# Altium PCB 606-100868-r01.pcbdoc
Units mm, origin at the board's own origin, x right, y up, seen from the top; angles counter-clockwise.
Board outline 50 x 10 mm, 2 copper layers (Top Layer, Bottom Layer), stack 1.471 mm thick; 23 components, 9 nets, 72 pads, 30 vias.
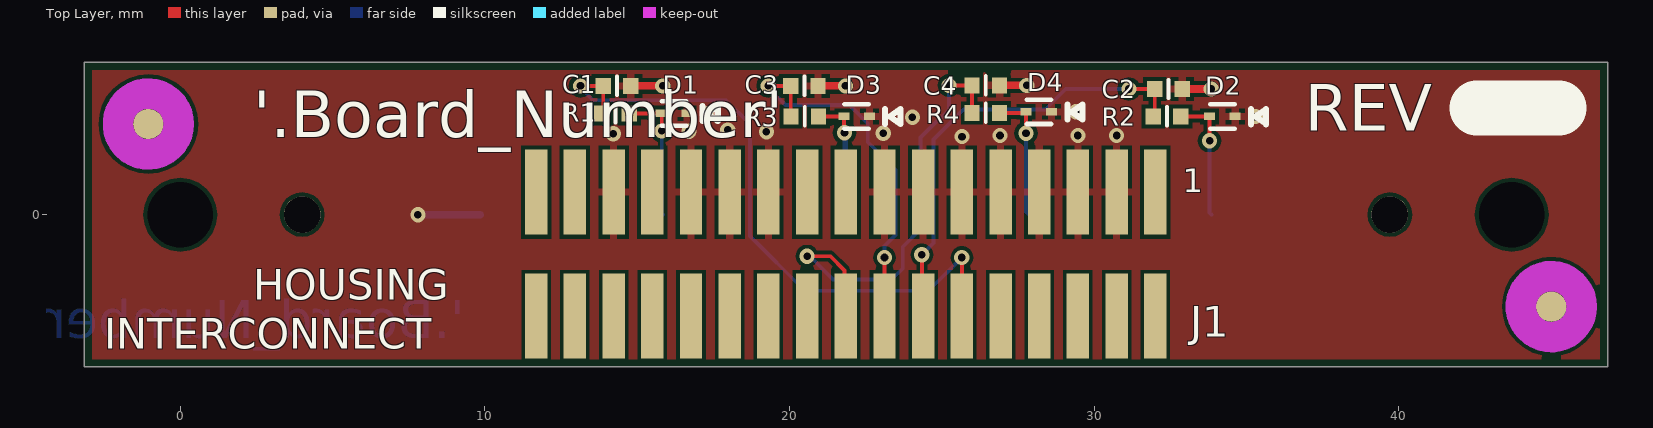
[diagram p0: Top Layer view]
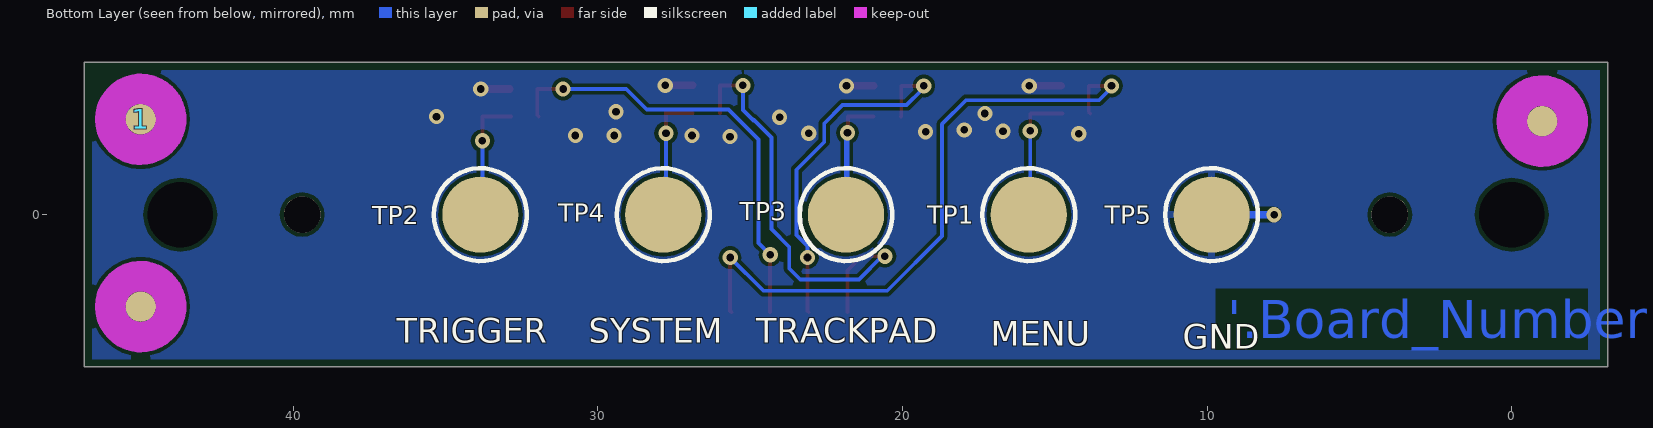
[diagram p1: Bottom Layer view, seen from below]

## Layer stack, top to bottom
Top Solder: solder mask 0.0102, Solder Resist, Dk 3.5
Top Layer: signal copper 0.0356
Dielectric 1: core 1.4, FR-4, Dk 4.2
Bottom Layer: signal copper 0.0356
Bottom Solder: solder mask 0.0102, Solder Resist, Dk 3.5

## Board outline
-3.15,-5 46.85,-5 46.85,5 -3.15,5

## Design rules (kind name [scope] priority, off if disabled: settings)
BoardOutlineClearance [All] p1: gap=0.25 except(0: Text-OutlineEdge)
Clearance [All] p1: gap=0.125
ComponentClearance [All] p1: gap=0.18 collisioncheckmode=3 verticalgap=0.18 showdistances=FALSE
HoleSize [All] p1: absolutevalues=TRUE maxlimit=2.7 minlimit=0.025 maxpercent=80.000 minpercent=20.000
MinimumSolderMaskSliver MinimumSolderMaskSliver_1 [isvia vs IsPad] p1: minsoldermaskwidth=0
MinimumSolderMaskSliver [All] p2: minsoldermaskwidth=0.05
PlaneClearance [All] p1: clearance=0.2
PlaneConnect [All] p1: planeconnectstyle=Direct reliefexpansion=0.508 reliefentries=4 reliefconductorwidth=0.254 reliefairgap=0.254
PolygonConnect MTG [InPadClass('Thick_Thermal')] p1: connectstyle=Relief reliefconductorwidth=0.4 reliefentries=4 polygonreliefangle="90 Angle" airgapwidth=0.125
PolygonConnect POLY_VIA [IsVia vs IsPolygon] p2: connectstyle=Direct reliefconductorwidth=0.254 reliefentries=4 polygonreliefangle="90 Angle" airgapwidth=0.254
PolygonConnect PolygonConnect_1 [All] p3: connectstyle=Relief reliefconductorwidth=0.25 reliefentries=4 polygonreliefangle="90 Angle" airgapwidth=0.125
RoomDefinition Housing_Interconnect [InComponentClass('Housing_Interconnect')] p1: confinementstyle=ConfineIn formatcopy=TRUE lockcomponents=FALSE outline -13.285,-3.467 70.231,-3.467 70.231,18.529 -13.285,18.529
RoutingVias [All] p1: holewidth=0.25 width=0.5 viastyle="Through Hole" minholewidth=0.25 minwidth=0.5 maxholewidth=0.25 maxwidth=0.5
SilkToSilkClearance [All] p1 off: silktosilkclearance=0.05
SilkToSolderMaskClearance [IsPad] p1: minsilkscreentomaskgap=0.125 clearancetoexposedcopper=TRUE
SolderMaskExpansion [All] p1: expansion=0.05
Width PWR_GND [InNetClass('PWR_GND')] p1: maxlimit=0.25 minlimit=0.25 preferedwidth=0.25
Width CRITICAL [InNetClass('MOTOR_DRIVERS')] p2: maxlimit=0.4 minlimit=0.3 preferedwidth=0.4
Width [All] p3: maxlimit=0.5 minlimit=0.125 preferedwidth=0.125
23 further rules are at their usual default settings.

## Classes and differential pairs
component class Housing_Interconnect: C1 C2 C3 C4 D1 D2 D3 D4 J1 R1 R2 R3 R4 TP1 TP2 TP3 TP4 TP5
net class PWR_GND: GND

## Components (designator, comment, footprint, x,y, rotation, side; value= is the part's Value field where it differs from the comment)
1 "Comment" Fiducial_c100opening300 45,3.13 r180 bottom
C1 "0.1uF" 0402-IPCsm_55 14.335,4.225 r0 top
C2 "0.1uF" 0402-IPCsm_55 32.435,4.125 r0 top
C3 "0.1uF" 0402-IPCsm_55 20.485,4.225 r0 top
C4 "0.1uF" 0402-IPCsm_55 26.435,4.244 r0 top
D1 "ESD9R3.3ST5G" sod923-40 16.205,3.325 r0 top
D2 "ESD9R3.3ST5G" sod923-40 34.205,3.224 r0 top
D3 "ESD9R3.3ST5G" sod923-40 22.201,3.225 r0 top
D4 "ESD9R3.3ST5G" sod923-40 28.179,3.375 r0 top
J1 "FTSH-117-01-F-DV-K" FTSH-117-01-XXX-DV-K 21.843,-1.293 r180 top
R1 "100" 0402-IPCsm_40 14.285,3.325 r0 top
R2 "100" 0402-IPCsm_40 32.385,3.224 r0 top
R3 "100" 0402-IPCsm_40 20.496,3.225 r0 top
R4 "100" 0402-IPCsm_40 26.435,3.339 r0 top
TP1 "2.5mm" TPC250SMT 15.85,0 r180 bottom
TP2 "2.5mm" TPC250SMT 33.85,0 r180 bottom
TP3 "2.5mm" TPC250SMT 21.85,0 r180 bottom
TP4 "2.5mm" TPC250SMT 27.85,0 r180 bottom
TP5 "2.5mm" TPC250SMT 9.85,0 r180 bottom
? "Comment" Fiducial_c100opening300 -1.048,2.975 r0 top
? "Comment" Fiducial_c100opening300 45,-3.019 r0 top
? "Comment" Fiducial_c100opening300 45,-3.019 r180 bottom
? "Comment" Fiducial_c100opening300 -1,3.069 r180 bottom

## Footprints (in the part's own frame and the unit in brackets; to place one, negate y for a bottom-side part, rotate by r counter-clockwise, add the part's x,y. Pads: shape width x height; smd on the part's side, far side on the other; paste and mask are expansions set on the pad)
0402-IPCsm_40 [mm] "0402-IPCSM_40"
  rect 0.5x0.52 smd mask+0.05: 1(-0.45,0) 2(0.45,0)
  silkscreen extent 0,-0.3 0,0.3, body extent -0.5,-0.2 0.5,0.2, height 0.4
0402-IPCsm_55 [mm] "0402-IPCSM_55"
  rect 0.5x0.52 smd mask+0.05: 1(-0.45,0) 2(0.45,0)
  silkscreen extent 0,-0.3 0,0.3, body extent -0.5,-0.2 0.5,0.2, height 0.55
Fiducial_c100opening300 [mm]
  round 1 smd paste-10 mask+1: 0(0,0)
  Top Layer keep-out circle w1: c0,0 r1
FTSH-117-01-XXX-DV-K [mil]
  rect 29x110 smd mask+2: 1(-400,-80) 2(-400,80) 3(-350,-80) 4(-350,80) 5(-300,-80) 6(-300,80) 7(-250,-80) 8(-250,80) 9(-200,-80) 10(-200,80) 11(-150,-80) 12(-150,80) 13(-100,-80) 14(-100,80) 15(-50,-80) 16(-50,80) 17(0,-80) 18(0,80) 19(50,-80) 20(50,80) 21(100,-80) 22(100,80) 23(150,-80) 24(150,80) 25(200,-80) 26(200,80) 27(250,-80) 28(250,80) 29(300,-80) 30(300,80) 31(350,-80) 32(350,80) 33(400,-80) 34(400,80)
  body extent -424,-68 425,68, height 220
sod923-40 [mm] "SOD923 .4mm High"
  rect 0.36x0.25 smd mask+0.05: A(0.42,0) C(-0.42,0)
  silkscreen extent -0.4,-0.4 1.44,0.4, body extent -0.45,-0.35 0.45,0.35, height 0.4
TPC250SMT [mm] "2.5mm Circular Test Point"
  round 2.5 smd paste-5 mask+0.05: 1(0,0)
  silkscreen extent -1.53,-1.52 1.52,1.52

## Part data
C1 C2 C3 C4: library part GRM155R71C104KA88D, "CAP CER .1UF 16V X7R 0402"
D1 D2 D3 D4: "TVS DIODE 3.3VWM 7.8VC SOD923"
J1: library part FTSH-117-01-f-DV-k, "34 Positions Header, Shrouded Connector 0.050\" (1.27mm) Surface Mount Gold"
R1 R2 R3 R4: library part MCR01MZPJ101, "RES 100 OHM 5% 0402 SMD"
TP1 TP2 TP3 TP4 TP5: library part TPC250SMT, "TEST POINT, SMT, 2.50mm"

## Free pads (board coordinates)
  round 1.2 hole 1.2 unplated: 0(4,0) 0(39.7,0)
  round 2 hole 2.15 unplated: 1(0,0) 1(43.7,0)

## Via types
v1: diameter 0.5, hole 0.25, Top Layer to Bottom Layer, tented both sides, 30 vias

## Nets (pads, with @x,y where several pads share a name; then routed paths per layer and width w, separated by ;. In a path a pad name is that pad's centre, name@x,y a point inside that pad or via, vN(x,y) a via of type N, cw(c..) or ccw(c..) an arc to the next point about the centre after c; other vN are vias at no path point)
BTN_MENU: C1.1 J1.12 R1.1 | length 21.3
  Top Layer w0.125: v1(13.135,4.225) C1.1 13.885,3.375 R1.1 ; J1.12@25.61,-3.2 25.653,-3.157 v1(25.653,-1.407)
  Bottom Layer w0.125: v1@13.2,4.1 13.542,3.758 17.913,3.758 18.7,2.97 18.7,-0.704 20.496,-2.5 24.56,-2.5 v1(25.653,-1.407)
BTN_SYS: C4.1 J1.18 R4.1 | length 14.7
  Top Layer w0.125: v1(20.573,-1.362) 21.332,-1.362 21.8,-1.83 J1.18@21.8,-3.2 ; v1(25.235,4.244) C4.1 R4.1
  Bottom Layer w0.125: v1(20.573,-1.362) 20.662,-1.362 21.425,-2.125 23.35,-2.125 23.711,-1.763 23.711,-1.057 24.3,-0.469 24.3,2.535 24.891,3.126 ; 24.891,3.09 25.235,3.433 v1(25.235,4.244)
BTN_TRACK: C3.1 J1.16 R3.1 | length 12.1
  Top Layer w0.125: v1(19.295,4.225) C3.1 20.035,3.236 R3.1 ; J1.16@23.07,-3.2 23.113,-3.157 v1(23.113,-1.407)
  Bottom Layer w0.125: v1@19.36,4.1 19.865,3.595 21.962,3.595 22.562,2.995 22.562,2.389 23.479,1.473 23.479,-0.666 23.113,-1.032 v1(23.113,-1.407)
BTN_TRIG: C2.1 J1.14 R2.1 | length 14.7
  Top Layer w0.125: J1.14@24.34,-3.2 v1(24.34,-1.318) ; v1(31.135,4.125) C2.1 31.985,3.274 R2.1
  Bottom Layer w0.125: v1(24.34,-1.318) 24.722,-0.935 24.722,2.469 25.706,3.452 28.388,3.452 29.06,4.125 v1(31.135,4.125)
GND: C1.2 C2.2 C3.2 C4.2 D1.A D2.A D3.A D4.A J1.3 J1.5 J1.7 J1.9 J1.11 J1.13 J1.15 J1.21 J1.23 J1.25 J1.29 TP5.1 | length 5.8
  Top Layer w0.25: C1.2 v1(15.835,4.225) ; C3.2 v1(21.835,4.225) ; C4.2 v1(27.785,4.244) ; C2.2 v1(33.835,4.125)
  Bottom Layer w0.25: v1(7.8,0) TP5.1
  other v1: 25.658,2.561 26.906,2.598 29.463,2.598 30.733,2.598 14.21,2.655 23.07,2.675 16.698,2.735 19.238,2.725 17.968,2.781 24.029,3.2 35.29,3.219 17.29,3.32 29.398,3.375
NetD1_C: D1.C R1.2 TP1.1 | length 4.4
  Top Layer w0.125: R1.2 D1.C 15.805,3.305 v1(15.805,2.748)
  Bottom Layer w0.125: v1(15.805,2.748) 15.805,0.045 TP1.1
NetD2_C: D2.C R2.2 TP2.1 | length 4.2
  Top Layer w0.125: R2.2 D2.C v1(33.785,2.425)
  Bottom Layer w0.125: v1(33.785,2.425) 33.785,0.065 TP2.1
NetD3_C: D3.C R3.2 TP3.1 | length 7
  Top Layer w0.125: R3.2 D3.C 21.781,2.528 v1@21.801,2.548
  Bottom Layer w0.125: TP3.1@21.801,0.049 TP3.1 21.85,2.637 v1(21.801,2.686) TP3.1@21.801,0.049
NetD4_C: D4.C R4.2 TP4.1 | length 4.3
  Top Layer w0.125: R4.2 27.723,3.339 D4.C v1(27.759,2.673)
  Bottom Layer w0.125: v1(27.759,2.673) 27.759,0.091 TP4.1
pads on no net: 1.0 ?.0 J1.1 J1.2 J1.4 J1.6 J1.8 J1.10 J1.17 J1.19 J1.20 J1.22 J1.24 J1.26 J1.27 J1.28 J1.30 J1.31 J1.32 J1.33 J1.34

## Polygon pours and split planes (outlines as drawn)
no net on FAB_DWG (solid): -334.868,3.5 -333.868,-0.5 -334.868,0 -335.868,-0.5 -334.868,3.5
no net on FAB_DWG (solid): -334.868,27.5 -335.868,31.5 -334.868,31 -333.868,31.5 -334.868,27.5
no net on FAB_DWG (solid): -277.368,4 ccw(c-277.868,4) -277.868,4.5 ccw(c-277.868,4) -278.368,4 ccw(c-277.868,4) -277.868,3.5 ccw(c-277.868,4) -277.368,4
no net on FAB_DWG (solid): -275.368,4 ccw(c-275.868,4) -275.868,4.5 ccw(c-275.868,4) -276.368,4 ccw(c-275.868,4) -275.868,3.5 ccw(c-275.868,4) -275.368,4
no net on FAB_DWG (solid): -247.768,12.5 -248.268,11 -279.468,11 -279.968,12.5 -247.768,12.5
no net on FAB_DWG (solid): -279.968,19.5 -279.468,21 -248.268,21 -247.768,19.5 -279.968,19.5
no net on FAB_DWG (solid): -277.368,28 ccw(c-277.868,28) -277.868,28.5 ccw(c-277.868,28) -278.368,28 ccw(c-277.868,28) -277.868,27.5 ccw(c-277.868,28) -277.368,28
no net on FAB_DWG (solid): -275.368,28 ccw(c-275.868,28) -275.868,28.5 ccw(c-275.868,28) -276.368,28 ccw(c-275.868,28) -275.868,27.5 ccw(c-275.868,28) -275.368,28
no net on FAB_DWG (solid): -273.368,4 ccw(c-273.868,4) -273.868,4.5 ccw(c-273.868,4) -274.368,4 ccw(c-273.868,4) -273.868,3.5 ccw(c-273.868,4) -273.368,4
no net on FAB_DWG (solid): -271.368,4 ccw(c-271.868,4) -271.868,4.5 ccw(c-271.868,4) -272.368,4 ccw(c-271.868,4) -271.868,3.5 ccw(c-271.868,4) -271.368,4
no net on FAB_DWG (solid): -269.368,4 ccw(c-269.868,4) -269.868,4.5 ccw(c-269.868,4) -270.368,4 ccw(c-269.868,4) -269.868,3.5 ccw(c-269.868,4) -269.368,4
no net on FAB_DWG (solid): -267.368,4 ccw(c-267.868,4) -267.868,4.5 ccw(c-267.868,4) -268.368,4 ccw(c-267.868,4) -267.868,3.5 ccw(c-267.868,4) -267.368,4
no net on FAB_DWG (solid): -271.368,28 ccw(c-271.868,28) -271.868,28.5 ccw(c-271.868,28) -272.368,28 ccw(c-271.868,28) -271.868,27.5 ccw(c-271.868,28) -271.368,28
no net on FAB_DWG (solid): -273.368,28 ccw(c-273.868,28) -273.868,28.5 ccw(c-273.868,28) -274.368,28 ccw(c-273.868,28) -273.868,27.5 ccw(c-273.868,28) -273.368,28
no net on FAB_DWG (solid): -269.368,28 ccw(c-269.868,28) -269.868,28.5 ccw(c-269.868,28) -270.368,28 ccw(c-269.868,28) -269.868,27.5 ccw(c-269.868,28) -269.368,28
no net on FAB_DWG (solid): -267.368,28 ccw(c-267.868,28) -267.868,28.5 ccw(c-267.868,28) -268.368,28 ccw(c-267.868,28) -267.868,27.5 ccw(c-267.868,28) -267.368,28
no net on FAB_DWG (solid): -265.368,4 ccw(c-265.868,4) -265.868,4.5 ccw(c-265.868,4) -266.368,4 ccw(c-265.868,4) -265.868,3.5 ccw(c-265.868,4) -265.368,4
no net on FAB_DWG (solid): -263.368,4 ccw(c-263.868,4) -263.868,4.5 ccw(c-263.868,4) -264.368,4 ccw(c-263.868,4) -263.868,3.5 ccw(c-263.868,4) -263.368,4
no net on FAB_DWG (solid): -259.368,4 ccw(c-259.868,4) -259.868,4.5 ccw(c-259.868,4) -260.368,4 ccw(c-259.868,4) -259.868,3.5 ccw(c-259.868,4) -259.368,4
no net on FAB_DWG (solid): -261.368,4 ccw(c-261.868,4) -261.868,4.5 ccw(c-261.868,4) -262.368,4 ccw(c-261.868,4) -261.868,3.5 ccw(c-261.868,4) -261.368,4
no net on FAB_DWG (solid): -263.368,28 ccw(c-263.868,28) -263.868,28.5 ccw(c-263.868,28) -264.368,28 ccw(c-263.868,28) -263.868,27.5 ccw(c-263.868,28) -263.368,28
no net on FAB_DWG (solid): -265.368,28 ccw(c-265.868,28) -265.868,28.5 ccw(c-265.868,28) -266.368,28 ccw(c-265.868,28) -265.868,27.5 ccw(c-265.868,28) -265.368,28
no net on FAB_DWG (solid): -259.368,28 ccw(c-259.868,28) -259.868,28.5 ccw(c-259.868,28) -260.368,28 ccw(c-259.868,28) -259.868,27.5 ccw(c-259.868,28) -259.368,28
no net on FAB_DWG (solid): -261.368,28 ccw(c-261.868,28) -261.868,28.5 ccw(c-261.868,28) -262.368,28 ccw(c-261.868,28) -261.868,27.5 ccw(c-261.868,28) -261.368,28
no net on FAB_DWG (solid): -251.368,4 ccw(c-251.868,4) -251.868,4.5 ccw(c-251.868,4) -252.368,4 ccw(c-251.868,4) -251.868,3.5 ccw(c-251.868,4) -251.368,4
no net on FAB_DWG (solid): -257.368,4 ccw(c-257.868,4) -257.868,4.5 ccw(c-257.868,4) -258.368,4 ccw(c-257.868,4) -257.868,3.5 ccw(c-257.868,4) -257.368,4
no net on FAB_DWG (solid): -255.368,4 ccw(c-255.868,4) -255.868,4.5 ccw(c-255.868,4) -256.368,4 ccw(c-255.868,4) -255.868,3.5 ccw(c-255.868,4) -255.368,4
no net on FAB_DWG (solid): -253.368,4 ccw(c-253.868,4) -253.868,4.5 ccw(c-253.868,4) -254.368,4 ccw(c-253.868,4) -253.868,3.5 ccw(c-253.868,4) -253.368,4
no net on FAB_DWG (solid): -251.368,28 ccw(c-251.868,28) -251.868,28.5 ccw(c-251.868,28) -252.368,28 ccw(c-251.868,28) -251.868,27.5 ccw(c-251.868,28) -251.368,28
no net on FAB_DWG (solid): -257.368,28 ccw(c-257.868,28) -257.868,28.5 ccw(c-257.868,28) -258.368,28 ccw(c-257.868,28) -257.868,27.5 ccw(c-257.868,28) -257.368,28
no net on FAB_DWG (solid): -255.368,28 ccw(c-255.868,28) -255.868,28.5 ccw(c-255.868,28) -256.368,28 ccw(c-255.868,28) -255.868,27.5 ccw(c-255.868,28) -255.368,28
no net on FAB_DWG (solid): -253.368,28 ccw(c-253.868,28) -253.868,28.5 ccw(c-253.868,28) -254.368,28 ccw(c-253.868,28) -253.868,27.5 ccw(c-253.868,28) -253.368,28
no net on FAB_DWG (solid): -249.368,4 ccw(c-249.868,4) -249.868,4.5 ccw(c-249.868,4) -250.368,4 ccw(c-249.868,4) -249.868,3.5 ccw(c-249.868,4) -249.368,4
no net on FAB_DWG (solid): -249.368,28 ccw(c-249.868,28) -249.868,28.5 ccw(c-249.868,28) -250.368,28 ccw(c-249.868,28) -249.868,27.5 ccw(c-249.868,28) -249.368,28
no net on FAB_DWG (solid): 82 vertices, not listed, extent 346.158,-60.343 352.503,-57.115
no net on FAB_DWG (solid): 83 vertices, not listed, extent 334.545,-61.699 339.45,-57.111
no net on FAB_DWG (solid): 74 vertices, not listed, extent 320.763,-62.933 328.156,-56.198
no net on FAB_DWG (solid): 89 vertices, not listed, extent 309.093,-59.962 315.513,-56.198
no net on FAB_DWG (solid): 1029 vertices, not listed, extent 268.874,-69.77 409.92,-56.196
no net on ASY_DWG (solid): 82 vertices, not listed, extent 346.158,-60.343 352.503,-57.115
no net on ASY_DWG (solid): 83 vertices, not listed, extent 334.545,-61.699 339.45,-57.111
no net on ASY_DWG (solid): 74 vertices, not listed, extent 320.763,-62.933 328.156,-56.198
no net on ASY_DWG (solid): 89 vertices, not listed, extent 309.093,-59.962 315.513,-56.198
no net on ASY_DWG (solid): 1029 vertices, not listed, extent 268.874,-69.77 409.92,-56.196
no net on ASY_DWG_R (solid): 82 vertices, not listed, extent -303.663,-60.343 -297.318,-57.115
no net on ASY_DWG_R (solid): 83 vertices, not listed, extent -290.611,-61.699 -285.706,-57.111
no net on ASY_DWG_R (solid): 74 vertices, not listed, extent -279.316,-62.933 -271.924,-56.198
no net on ASY_DWG_R (solid): 89 vertices, not listed, extent -266.673,-59.962 -260.254,-56.198
no net on ASY_DWG_R (solid): 1029 vertices, not listed, extent -361.08,-69.77 -220.034,-56.196
no net on TITLEBLOCK (solid): 26 vertices, not listed, extent -7.03,-37.67 -4.33,-36.37
no net on TITLEBLOCK (solid): -11.87,-38.27 -10.88,-36.47 -9.98,-38.27 -11.87,-38.27
no net on TITLEBLOCK (solid): -22.355,-36.37 -21.232,-37.579 -20.153,-36.37 -22.355,-36.37
no net on TITLEBLOCK (solid): -17.168,-36.37 -14.63,-38.688 -14.63,-36.37 -17.168,-36.37
no net on TITLEBLOCK (solid): 331 vertices, not listed, extent -39.105,-42.77 19.6,-36.15
GND on Top Layer "GND_L01_P000" (solid, pour order 0): 47.5,5.8 47.5,-5.9 -4.4,-5.9 -4.4,5.8 47.5,5.8
GND on Bottom Layer "GND_L02_P002" (solid, pour order 2): 47.9,5.8 47.9,-5.9 -4,-5.9 -4,5.8 47.9,5.8

## Other copper
Top Layer:
  text ".Layer_Name" at -10.503,-61.4 h3.5
Bottom Layer:
  text "'.Board_Number'-R'.PCB_Revision'" at 9.336,-4.058 h1.25
  text ".Layer_Name" at -14.994,-61.4 h3.5

## Silkscreen, mask and mechanical layers (free items; w line width, h text height)
Top Overlay:
  lines w1.8: 42.553,3.499 45.253,3.499
  text "REV" at 36.9,2.751 h1.52
  text "'.Board_Number'" at 2.4,2.54 h1.52
  text "HOUSING" at 2.4,-2.8 h1
  text "INTERCONNECT" at -2.5,-4.4 h1
  text ".Layer_Name" at -11.344,-61.317 h3.5
Bottom Overlay:
  text "TRACKPAD" at 24.8,-4.2 h0.8
  text "SYSTEM" at 30.3,-4.2 h0.8
  text "TRIGGER" at 36.6,-4.2 h0.8
  text "MENU" at 17.1,-4.3 h0.8
  text "GND" at 10.8,-4.4 h0.8
  text ".Layer_Name" at -16.269,-61.242 h3.5
Top Paste:
  text ".Layer_Name" at -11.219,-62.017 h3.5
Bottom Paste:
  text ".Layer_Name" at -15.144,-61.983 h3.5
Top Solder:
  text ".Layer_Name" at -11.328,-61.4 h3.5
Bottom Solder:
  text ".Layer_Name" at -14.769,-61.517 h3.5
Drill Guide:
  text ".Layer_Name" at 11.131,-16.567 h3.81
Outline:
  the board outline again, w0.013
FAB_DWG:
  drawing of 169 lines, arcs and shapes, not listed
  text "1" at 352.756,388.218 h7.62
  text "6" at -198.576,388.04 h7.62
  text "5" at -87.984,387.964 h7.62
  text "7" at -308.507,387.913 h7.62
  text "4" at 21.617,387.812 h7.62
  text "3" at 132.386,387.812 h7.62
  text "2" at 242.419,387.812 h7.62
  text "REVISIONS" at 306.776,379.23 h2.54
  text "REV" at 224.484,372.23 h2.03
  text "DESCRIPTION" at 278.988,372.23 h2.03
  text "DATE" at 370.672,372.23 h2.03
  text "APRVD" at 395.86,372.23 h2.03
  text "NOTES: UNLESS OTHERWISE SPECIFIED" at -331.427,366.415 h2.03
  text "01" at 224.888,364.23 h2.54
  text "INITIAL RELEASE" at 235.92,364.23 h2.54
  text "07/21/2016" at 364.76,364.23 h2.54
  text "1   DIMENSIONS AND VALUES ARE METRIC." at -335.177,358.415 h2.03
  text "2   FABRICATION OF PRINTED CIRCUIT BOARD SHALL BE IN ACCORDANCE WITH" at -335.177,352.415 h2.03
  text "IPC-6011 AND IPC-6012, CLASS 2, AND THE DESIGN INTENT OF IPC-2221 AND" at -335.177,348.415 h2.03
  text "IPC-2222,CLASS 2, AND SHALL MEET THE ACCEPTABILITY REQUIREMENTS OF" at -335.177,344.415 h2.03
  text "IPC-A-600. PRODUCE PCB USING GERBER OR ODB++ FILES PROVIDED." at -335.177,340.415 h2.03
  text "3   FABRICATION VENDOR MUST BE UL APPROVED AND BOARD SHALL BE MARKED WITH" at -335.177,334.415 h2.03
  text "A UL REGISTERED LOGO. MATERIAL MUST MEET UL 94V-0 FLAMMABILITY RATING." at -335.177,330.415 h2.03
  text "4   MATERIAL REQUIREMENTS: MANUFACTURER SHALL SELECT MATERIALS TO ACHIEVE A" at -335.177,324.415 h2.03
  text "BALANCED CONSTRUCTION WITH THE OPTION OF MODIFYING DIELECTRIC THICKNESS" at -335.177,320.415 h2.03
  text "D" at 414.605,318.546 h7.62
  text "D" at -370.077,318.394 h7.62
  text "TO MEET THE REQUIREMENTS SPECIFIED HEREIN." at -335.177,316.415 h2.03
  text "5   BASE MATERIALS: GLASS EPOXY FR4 OR EQUIVALENT PER IPC-4101 MEETING RoHS" at -335.177,310.415 h2.03
  text "REQUIREMENTS FOR PCB FABRICATION AND ASSEMBLY, NOT LESS THAN TG150," at -335.177,306.415 h2.03
  text "A  SEE LAYER DETAIL FOR LAYER STACK UP, ESTIMATED DIELECTRIC THICKNESS," at -335.177,302.415 h2.03
  text "AND COPPER WEIGHT." at -335.177,298.415 h2.03
  text "B  MANUFACTURER SHALL SUBMIT A PROPOSED STACK UP FOR SYNAPSE APPROVAL" at -335.177,294.415 h2.03
  text "IF MODIFICATION IS REQUIRED." at -335.177,290.415 h2.03
  text "C  NO MATERIAL SUBSTITUTIONS WILL BE ALLOWED WITHOUT SYNAPSE APPROVAL." at -335.177,286.415 h2.03
  text "6   PROCESSING ALLOWANCE:" at -335.177,280.415 h2.03
  text "A  LAYER REGISTRATION FROM PRIMARY SIDE TO SECONDARY SIDE SHALL NOT" at -335.177,276.415 h2.03
  text "EXCEED 0.13mm TOTAL." at -335.177,272.415 h2.03
  text "B  MAXIMUM BOW AND TWIST SHALL BE .75% PER IPC-TM-650." at -335.177,268.415 h2.03
  text "7   VIAS" at -335.177,262.415 h2.03
  text "A  VIAS WITH A FINISHED HOLE SIZE OF 0.25mm OR SMALLER DO NOT REQUIRE" at -335.177,258.415 h2.03
  text "A MINIMUM HOLE SIZE AND MAY BE PLATED SHUT OR FILLED WITH SOLDER" at -335.177,254.415 h2.03
  text "MASK. MINIMUM SOLDER PLATING MUST BE MAINTAINED." at -335.177,250.415 h2.03
  text "B  ALL 0.2MM VIA-IN-PADS TO BE FILLED WITH NON-CONDUCTIVE EXPOXY AND COPLANAR." at -335.177,246.415 h2.03
  text "8   CONDUCTORS:  COPPER FOIL SHALL BE IN ACCORDANCE WITH IPC-4562/0." at -335.177,240.415 h2.03
  text "A  FINISH. COPPER PLATE THICKNESS ON SURFACE COPPER AND PLATED" at -335.177,236.415 h2.03
  text "THROUGH HOLES TO BE 0.025mm MINIMUM." at -335.177,232.415 h2.03
  text "B  MINIMUM FINISH CONDUCTOR WIDTH IS 0.076mm" at -335.177,228.415 h2.03
  text "C  MINIMUM FINISHED CONDUCTOR SPACING (AIR GAP) INCLUDING PADS, VIAS," at -335.177,224.415 h2.03
  text "SHAPES, ETC. IS 0.076mm." at -335.177,220.415 h2.03
  text "9   FINAL FINISH SHALL BE ELECTROLESS NICKEL / IMMERSION GOLD (ENIG)." at -335.177,214.415 h2.03
  text "FINISH THICKNESS SHALL BE 3 TO 6 um [118 TO 236 MICROINCHES] OF NICKEL" at -335.177,210.415 h2.03
  text "AND 0.04 TO 0.125um [1.5 TO 5 MICROINCHES] OF GOLD." at -335.177,206.415 h2.03
  text "FINISH SHALL BE RoHS COMPLIANT AND MEET REQUIREMENTS OF IPC-4552." at -335.177,202.415 h2.03
  text "10  FILLETING IS NOT PERMITTED WITHOUT PRIOR SYNAPSE APPROVAL." at -335.177,196.415 h2.03
  text "C" at 414.605,193.095 h7.62
  text "C" at -370.204,192.892 h7.62
  text "11  SOLDER MASK AND COATING:  APPLY SOLDER MASK TO PRIMARY AND SECONDARY" at -335.177,190.415 h2.03
  text "SIDES OF PRINTED WIRING BOARD USING SUPPLIED GERBER FILES IN ACCORDANCE" at -335.177,186.415 h2.03
  text "WITH IPC-SM-840, THICKNESS BETWEEN 0.02 - 0.04mm, COLOR BLACK MATTE," at -335.177,182.415 h2.03
  text "CLASS 2." at -335.177,178.415 h2.03
  text "12  OVERALL BOARD THICKNESS SHALL BE MEASURED OVER FINAL FINISH INCLUDING" at -335.177,172.415 h2.03
  text "SOLDER MASK." at -335.177,168.415 h2.03
  text "13  SILKSCREEN:  APPLY SILKSCREEN (LEGEND) TO PRIMARY AND SECONDARY SIDES" at -335.177,162.415 h2.03
  text "OF PRINTED CIRCUIT BOARD. USE PERMANENT INK, NON-NUTRIENT, NON-" at -335.177,158.415 h2.03
  text "CONDUCTIVE POLYMER, COLOR WHITE, PER IPC-4781, TYPE 2. RELIEVE LEGEND" at -335.177,154.415 h2.03
  text "FROM ALL EXPOSED LANDS AND HOLES AS REQUIRED." at -335.177,150.415 h2.03
  text "14  ANY ALTERATIONS TO THE PROVIDED GERBER ARTWORK FILES MUST BE SUBMITTED" at -335.177,144.415 h2.03
  text "TO SYNAPSE FOR APPROVAL." at -335.177,140.415 h2.03
  text "15  IMPEDANCE REQUIREMENTS: LAYERS AND SIGNALS WITH CONTROLLED IMPEDANCES" at -335.319,134.733 h2.03
  text "ARE DETAILED IN THE CONTROLLED IMPEDANCE CHART. MANUFACTURER HAS THE" at -335.177,130.415 h2.03
  text "OPTION OF ADJUSTING THE DIELECTRIC THICKNESS AND TRACE WIDTHS AS" at -335.177,126.165 h2.03
  text "REQUIRED TO MEET THE SPECIFICATIONS CONTAINED IN THIS DRAWING." at -335.177,122.165 h2.03
  text "A  IMPEDANCE TOLERANCES ARE +/-10%." at -335.177,117.165 h2.03
  text "B  ANY ADJUSTMENTS TO DIELECTRIC THICKNESS OR TRACE WIDTHS MUST BE" at -335.177,112.415 h2.03
  text "APPROVED BY SYNAPSE." at -335.177,108.665 h2.03
  text "C  IMPEDANCE TEST RESULTS AND TEST COUPONS FROM EACH LOT SHALL BE" at -335.177,104.165 h2.03
  text "PROVIDED TO SYNAPSE." at -335.177,100.358 h2.03
  text "16  MARK MANUFACTURER NAME, INITIALS, OR LOGO, LOT NUMBER, DATE CODE," at -335.177,94.915 h2.03
  text "UL RECOGNITION MARK AND FLAME RATING IN ETCH OR SILKSCREEN." at -335.177,90.915 h2.03
  text "17  PANELIZATION: COORDINATE WITH SYNAPSE OR THE SYNAPSE SPECIFIED" at -335.177,85.165 h2.03
  text "ASSEMBLY VENDOR FOR PANEL SIZE AND CONFIGURATION. IF BOARDS ARE" at -335.177,81.165 h2.03
  text "NOT TO BE COMPLETELY ROUTED OUT, TRIM PANELIZATION TABS TO LESS" at -335.177,77.165 h2.03
  text "THAN 0.1mm UPON DE-PANELIZATION. AVOID PANELIZATION TABS IN AREAS" at -335.177,73.165 h2.03
  text "INDICATED ON THIS DRAWING." at -335.177,69.165 h2.03
  text "B" at -369.975,67.492 h7.62
  text "B" at 414.732,67.492 h7.62
  text "18  BOARD MUST BE ELECTRICALLY TESTED USING SUPPLIED IPC-356 NETLIST." at -335.177,64.165 h2.03
  text "COUNTER-SINK" at 186,51 h5
  text "2X Ø 2.15mm THRU ALL" at 195.79,45 h4
  text "\/ 4.20mm x 90°" at 195.79,41 h4
  text "PRIMARY SIDE" at -274.86,37 h2.29
  text "SILKSCREEN" at -244.368,32 h2.29
  text "SOLDERMASK" at -244.368,26.5 h2.29
  text "1.50 +/-0.15" at -345.86,20 h2.29
  text "SECONDARY SIDE" at 187,20 h3.5
  text "1 OZ CU" at -296.192,19.5 h2.29
  text "LAYER 1" at -244.368,19 h2.29
  text "FINISHED" at -342.196,15 h2.29
  text "DIELECTRIC" at -301.688,15 h2.29
  text "1 OZ CU" at -296.192,10.5 h2.29
  text "LAYER 2" at -244.368,10.5 h2.29
  text "THICKNESS" at -343.612,10 h2.29
  text "SOLDERMASK" at -244.368,3 h2.29
  text "SILKSCREEN" at -244.368,-3 h2.29
  text "SECONDARY SIDE" at -276.692,-7.5 h2.29
  text "LAYER DETAIL" at -288.252,-20.495 h5.08
  text "DIMENSIONS ARE FOR REFERENCE ONLY," at -9.15,-25.4 h2.29
  text "SCALE:NONE" at -274.528,-27.5 h2.29
  text "USE BOARD OUTLINE FOR DIMENSIONAL DATA." at -13.74,-30.19 h2.29
  text "A" at 414.478,-58.263 h7.62
  text "A" at -370.229,-58.39 h7.62
  text "APPROVALS" at 206.612,-61.77 h2.03
  text "DATE" at 249.672,-61.77 h2.03
  text "UNLESS OTHERWISE" at 150.664,-63.77 h2.54
  text "DESIGNER" at 189.92,-67.77 h2.03
  text "SPECIFIED" at 157.776,-68.77 h2.54
  text "DIMENSIONS ARE" at 152.696,-73.77 h2.54
  text "F. PRICE" at 193.92,-73.77 h2.54
  text "07/21/2016" at 243.76,-73.77 h2.54
  text "1511 Sixth Ave. Suite 300, Seattle, WA 98101 206.381.0898" at 281.008,-74.77 h2.54
  text "IN MILLIMETERS" at 152.696,-78.77 h2.54
  text "ENGINEER" at 189.92,-80.77 h2.03
  text "PRINTED CIRCUIT BOARD" at 307.416,-83.27 h3.81
  text "PROPRIETARY" at 102.156,-83.77 h3.81
  text "D. BRUEY" at 193.92,-86.77 h2.54
  text "TOLERANCES:" at 156.744,-88.77 h2.54
  text "AND" at 114.348,-89.77 h3.81
  text ".Board_Name" at 301.356,-91.517 h5.08
  text "MECH ENG" at 189.92,-93.77 h2.03
  text ".XX" at 155.424,-95.77 h2.29
  text "0.25" at 168.92,-95.77 h2.29
  text "CONFIDENTIAL" at 100.632,-96.27 h3.81
  text "SIZE" at 273.072,-97.77 h1.78
  text "DWG NO" at 283.92,-97.77 h1.78
  text "REV" at 391.784,-97.77 h1.78
  text "A. DAHLGREN" at 193.92,-99.77 h2.54
  text "THE INFORMATION CONTAINED IN" at 102.646,-100.52 h1.52
  text ".XXX" at 153.592,-102.77 h2.29
  text "0.127" at 168.92,-102.77 h2.29
  text "THIS DRAWING IS PROPRIETARY AND" at 100.822,-103.27 h1.52
  text "RESTRICTED. ANY REPRODUCTION" at 102.646,-106.02 h1.52
  text "601-" at 300.975,-107.471 h7.62
  text ".Board_Number" at 329.375,-107.571 h7.62
  text "D" at 272.872,-107.77 h7.62
  text ".PCB_Revision" at 387.316,-108.278 h7.62
  text "IN PART OR WHOLE WITHOUT THE" at 102.646,-108.77 h1.52
  text "ANGLES" at 155.928,-109.77 h2.29
  text "5" at 174.92,-109.77 h2.29
  text "EXPRESS WRITTEN PERMISSION" at 103.612,-111.52 h1.52
  text "OF THE OWNER IS PROHIBITED" at 103.612,-114.27 h1.52
  text "SCALE:NONE" at 273.8,-114.77 h1.78
  text "SHEET 1 OF 1" at 385.376,-114.77 h1.78
  text "1" at 352.96,-126.818 h7.62
  text "6" at -198.5,-126.97 h7.62
  text "5" at -88.061,-126.97 h7.62
  text "4" at 21.388,-127.249 h7.62
  text "3" at 132.208,-127.275 h7.62
  text "2" at 242.647,-127.275 h7.62
  text "7" at -308.609,-127.834 h7.62
ASY_DWG:
  circle w0.38: c178.663,-107.222 r0.829
  lines w0.3: 188.92,-116.77 188.92,-56.77 ; 188.92,-102.77 268.92,-102.77 ; 188.92,-89.77 268.92,-89.77 ; 188.92,-76.77 268.92,-76.77 409.92,-76.77 ; 188.92,-63.77 268.92,-63.77 ; 219.92,355.23 409.92,355.23 ; 220.245,362.322 219.92,362.23 409.92,362.23 ; 220.245,377.322 219.92,377.23 409.92,377.23 ; 233.92,348.23 233.92,377.23 ; 238.92,-116.77 238.92,-56.77 ; 268.92,-116.77 268.92,-56.77 ; 268.92,-110.77 409.92,-110.77 ; 268.92,-94.77 408.92,-94.77 ; 281.92,-110.77 281.92,-94.77 ; 358.92,348.23 358.92,377.23 ; 377.92,-110.77 377.92,-94.77 ; 389.92,348.23 389.92,377.23
  lines w0.38: 163.92,-102.77 165.92,-102.77 ; 163.92,-100.77 165.92,-100.77 ; 163.92,-95.77 165.92,-95.77 ; 163.92,-93.77 165.92,-93.77 ; 164.92,-101.77 164.92,-99.77 ; 164.92,-94.77 164.92,-92.77 ; 169.92,-109.77 171.92,-109.77 ; 169.92,-107.77 171.92,-107.77 ; 170.92,-108.77 170.92,-106.77
  lines w0.508: 189.942,384.434 189.942,397.388 ; 189.942,384.434 189.942,397.388 ; 189.942,384.434 189.942,397.388 ; -380.669,7.879 -361.365,7.879 -380.669,7.879 ; -380.669,8.336 -361.365,8.336 -380.669,8.336 ; -380.669,133.278 -361.365,133.278 -380.669,133.278 ; -380.669,133.736 -361.365,133.736 -380.669,133.736 ; -380.669,258.678 -361.365,258.678 -380.669,258.678 ; -380.669,259.135 -361.365,259.135 -380.669,259.135 ; -251.433,-130.221 -251.433,-117.267 -251.433,-130.221 ; -251.433,384.434 -251.433,397.388 -251.433,384.434 ; -250.976,-130.221 -250.976,-117.267 -250.976,-130.221 ; -250.976,384.434 -250.976,397.388 -250.976,384.434 ; -141.223,-130.221 -141.223,-117.267 -141.223,-130.221 ; -141.223,384.434 -141.223,397.388 -141.223,384.434 ; -140.766,-130.221 -140.766,-117.267 -140.766,-130.221 ; -140.766,384.434 -140.766,397.388 -140.766,384.434 ; -30.987,-130.221 -30.987,-117.267 -30.987,-130.221 ; -30.987,384.434 -30.987,397.388 -30.987,384.434 ; -30.53,-130.221 -30.53,-117.267 -30.53,-130.221 ; -30.53,384.434 -30.53,397.388 -30.53,384.434 ; 79.275,384.434 79.275,397.388 79.275,384.434 ; 79.732,384.434 79.732,397.388 79.732,384.434 ; 189.485,384.434 189.485,397.388 189.485,384.434 ; 299.696,384.688 299.696,397.388 299.696,384.688 ; 299.721,-130.221 299.721,-117.267 299.721,-130.221 ; 300.153,384.434 300.153,397.388 300.153,384.434 ; 300.178,-130.221 300.178,-117.267 300.178,-130.221 ; 410.16,7.879 429.464,7.879 410.16,7.879 ; 410.16,8.336 429.464,8.336 410.16,8.336 ; 410.16,133.304 429.464,133.304 410.16,133.304 ; 410.16,133.761 429.464,133.761 410.16,133.761 ; 410.16,258.729 429.464,258.729 410.16,258.729 ; 410.16,259.186 429.464,259.186 410.16,259.186
  lines w1: -361.08,-116.77 -361.08,384.23 409.92,384.23 409.92,-116.77 -361.08,-116.77
  lines w1.1: 79.92,-129.77 79.92,-116.77 ; 93.92,-116.77 93.92,-76.77 144.92,-76.77 ; 144.92,-116.77 144.92,-76.77 ; 188.92,-129.77 188.92,-116.77 ; 219.92,348.23 219.92,384.23 ; 219.92,369.23 409.92,369.23 ; 268.92,-56.77 144.92,-56.77 144.92,-76.77
  text "1" at 352.756,388.218 h7.62
  text "6" at -198.576,388.04 h7.62
  text "5" at -87.984,387.964 h7.62
  text "7" at -308.507,387.913 h7.62
  text "4" at 21.617,387.812 h7.62
  text "3" at 132.386,387.812 h7.62
  text "2" at 242.419,387.812 h7.62
  text "REVISIONS" at 306.776,379.23 h2.54
  text "REV" at 224.484,372.23 h2.03
  text "DESCRIPTION" at 278.988,372.23 h2.03
  text "DATE" at 370.672,372.23 h2.03
  text "APRVD" at 395.86,372.23 h2.03
  text "NOTES: UNLESS OTHERWISE SPECIFIED" at -348.955,372.13 h2.03
  text "1   RoHS COMPLIANT ASSEMBLY REQUIRED. ASSEMBLE PER IPC-A-610, CLASS 2," at -348.855,365.63 h2.03
  text "01" at 224.888,364.23 h2.54
  text "INITIAL RELEASE" at 235.92,364.23 h2.54
  text "07/21/2016" at 364.76,364.23 h2.54
  text "2   AQUEOUS BASED CLEANING AFTER SOLDER FOR ALL COMPONENTS IS PREFERRED, NO-CLEAN" at -348.761,360.425 h2.03
  text "RoHS SOLDER PROCESS IS ACCEPTABLE." at -348.905,356.28 h2.03
  text "3   ITEM IDENTIFICATION: MARK REVISION NUMBER OF THIS DRAWING IN THE SPACE PROVIDED." at -349.08,350.48 h2.03
  text "D" at 414.605,318.546 h7.62
  text "D" at -370.077,318.394 h7.62
  text "C" at 414.605,193.095 h7.62
  text "C" at -370.204,192.892 h7.62
  text "B" at -369.975,67.492 h7.62
  text "B" at 414.732,67.492 h7.62
  text "ASSEMBLY TOP" at 2.604,-16.745 h3.81
  text "A" at 414.478,-58.263 h7.62
  text "A" at -370.229,-58.39 h7.62
  text "APPROVALS" at 206.612,-61.77 h2.03
  text "DATE" at 249.672,-61.77 h2.03
  text "UNLESS OTHERWISE" at 150.664,-63.77 h2.54
  text "DESIGNER" at 189.92,-67.77 h2.03
  text "SPECIFIED" at 157.776,-68.77 h2.54
  text "DIMENSIONS ARE" at 152.696,-73.77 h2.54
  text "F. PRICE" at 193.92,-73.77 h2.54
  text "07/21/2016" at 243.76,-73.77 h2.54
  text "1511 Sixth Ave. Suite 300, Seattle, WA 98101 206.381.0898" at 281.008,-74.77 h2.54
  text "IN MILLIMETERS" at 152.696,-78.77 h2.54
  text "ENGINEER" at 189.92,-80.77 h2.03
  text "PRINTED CIRCUIT BOARD ASSEMBLY" at 293.7,-83.27 h3.81
  text "PROPRIETARY" at 102.156,-83.77 h3.81
  text "D. BRUEY" at 193.92,-86.77 h2.54
  text "TOLERANCES:" at 156.744,-88.77 h2.54
  text "AND" at 114.348,-89.77 h3.81
  text ".Board_Name" at 307.604,-91.545 h5.08
  text "MECH ENG" at 189.92,-93.77 h2.03
  text ".XX" at 155.424,-95.77 h2.29
  text "0.25" at 168.92,-95.77 h2.29
  text "CONFIDENTIAL" at 100.632,-96.27 h3.81
  text "SIZE" at 273.072,-97.77 h1.78
  text "DWG NO" at 283.92,-97.77 h1.78
  text "REV" at 391.784,-97.77 h1.78
  text "A. DAHLGREN" at 193.92,-99.77 h2.54
  text "THE INFORMATION CONTAINED IN" at 102.646,-100.52 h1.52
  text ".XXX" at 153.592,-102.77 h2.29
  text "0.127" at 168.92,-102.77 h2.29
  text "THIS DRAWING IS PROPRIETARY AND" at 100.822,-103.27 h1.52
  text "RESTRICTED. ANY REPRODUCTION" at 102.646,-106.02 h1.52
  text "600-" at 299.675,-107.471 h7.62
  text ".Board_Number" at 329.375,-107.571 h7.62
  text "D" at 272.872,-107.77 h7.62
  text ".PCB_Revision" at 387.316,-108.278 h7.62
  text "IN PART OR WHOLE WITHOUT THE" at 102.646,-108.77 h1.52
  text "ANGLES" at 155.928,-109.77 h2.29
  text "5" at 174.92,-109.77 h2.29
  text "EXPRESS WRITTEN PERMISSION" at 103.612,-111.52 h1.52
  text "OF THE OWNER IS PROHIBITED" at 103.612,-114.27 h1.52
  text "SCALE:4:1" at 274.512,-114.77 h1.78
  text "SHEET 1 OF 2" at 385.376,-114.77 h1.78
  text "1" at 352.96,-126.818 h7.62
  text "6" at -198.5,-126.97 h7.62
  text "5" at -88.061,-126.97 h7.62
  text "4" at 21.388,-127.249 h7.62
  text "3" at 132.208,-127.275 h7.62
  text "2" at 242.647,-127.275 h7.62
  text "7" at -308.609,-127.834 h7.62
ASY_DWG_R:
  lines w0.3: -361.08,-110.77 -220.08,-110.77 ; -361.08,-76.77 -220.08,-76.77 ; -360.08,-94.77 -220.08,-94.77 ; -329.08,-110.77 -329.08,-94.77 ; -233.08,-110.77 -233.08,-94.77 ; -220.08,-116.77 -220.08,-56.77
  lines w0.508: -141.102,384.434 -141.102,397.388 ; -141.102,384.434 -141.102,397.388 ; -141.102,384.434 -141.102,397.388 ; -380.624,7.879 -361.32,7.879 -380.624,7.879 ; -380.624,8.336 -361.32,8.336 -380.624,8.336 ; -380.624,133.304 -361.32,133.304 -380.624,133.304 ; -380.624,133.761 -361.32,133.761 -380.624,133.761 ; -380.624,258.729 -361.32,258.729 -380.624,258.729 ; -380.624,259.186 -361.32,259.186 -380.624,259.186 ; -251.338,-130.221 -251.338,-117.267 -251.338,-130.221 ; -251.313,384.434 -251.313,397.388 -251.313,384.434 ; -250.881,-130.221 -250.881,-117.267 -250.881,-130.221 ; -250.856,384.688 -250.856,397.388 -250.856,384.688 ; -140.645,384.434 -140.645,397.388 -140.645,384.434 ; -30.892,384.434 -30.892,397.388 -30.892,384.434 ; -30.435,384.434 -30.435,397.388 -30.435,384.434 ; 79.37,-130.221 79.37,-117.267 79.37,-130.221 ; 79.37,384.434 79.37,397.388 79.37,384.434 ; 79.827,-130.221 79.827,-117.267 79.827,-130.221 ; 79.827,384.434 79.827,397.388 79.827,384.434 ; 189.606,-130.221 189.606,-117.267 189.606,-130.221 ; 189.606,384.434 189.606,397.388 189.606,384.434 ; 190.063,-130.221 190.063,-117.267 190.063,-130.221 ; 190.063,384.434 190.063,397.388 190.063,384.434 ; 299.816,-130.221 299.816,-117.267 299.816,-130.221 ; 299.816,384.434 299.816,397.388 299.816,384.434 ; 300.273,-130.221 300.273,-117.267 300.273,-130.221 ; 300.273,384.434 300.273,397.388 300.273,384.434 ; 410.205,7.879 429.509,7.879 410.205,7.879 ; 410.205,8.336 429.509,8.336 410.205,8.336 ; 410.205,133.278 429.509,133.278 410.205,133.278 ; 410.205,133.736 429.509,133.736 410.205,133.736 ; 410.205,258.678 429.509,258.678 410.205,258.678 ; 410.205,259.135 429.509,259.135 410.205,259.135
  lines w1: -361.08,-116.77 -361.08,384.23 409.92,384.23 409.92,-116.77 -361.08,-116.77
  lines w1.1: -140.08,-129.77 -140.08,-116.77 ; -31.08,-129.77 -31.08,-116.77
  text "1" at -303.916,388.218 h7.62
  text "6" at 247.416,388.04 h7.62
  text "5" at 136.824,387.964 h7.62
  text "7" at 357.347,387.913 h7.62
  text "2" at -193.579,387.812 h7.62
  text "3" at -83.546,387.812 h7.62
  text "4" at 27.223,387.812 h7.62
  text "NOTES: UNLESS OTHERWISE SPECIFIED" at 397.795,372.13 h2.03
  text "1   RoHS COMPLIANT ASSEMBLY REQUIRED. ASSEMBLE PER IPC-A-610, CLASS 2," at 397.695,365.63 h2.03
  text "2   AQUEOUS BASED CLEANING AFTER SOLDER FOR ALL COMPONENTS IS PREFERRED, NO-CLEAN" at 397.601,360.425 h2.03
  text "RoHS SOLDER PROCESS IS ACCEPTABLE." at 397.745,356.28 h2.03
  text "3   ITEM IDENTIFICATION: MARK REVISION NUMBER OF THIS DRAWING IN THE SPACE PROVIDED." at 397.92,350.48 h2.03
  text "D" at -365.765,318.546 h7.62
  text "D" at 418.917,318.394 h7.62
  text "C" at -365.765,193.095 h7.62
  text "C" at 419.044,192.892 h7.62
  text "B" at -365.892,67.492 h7.62
  text "B" at 418.815,67.492 h7.62
  text "ASSEMBLY BOTTOM" at 47.604,-16.745 h3.81
  text "A" at -365.638,-58.263 h7.62
  text "A" at 419.069,-58.39 h7.62
  text "1511 Sixth Ave. Suite 300, Seattle, WA 98101 206.381.0898" at -232.168,-74.77 h2.54
  text "PRINTED CIRCUIT BOARD ASSEMBLY" at -244.86,-83.27 h3.81
  text ".Board_Name" at -258.764,-91.545 h5.08
  text "REV" at -342.944,-97.77 h1.78
  text "DWG NO" at -235.08,-97.77 h1.78
  text "SIZE" at -224.232,-97.77 h1.78
  text "600-" at -250.835,-107.471 h7.62
  text ".Board_Number" at -280.535,-107.571 h7.62
  text "D" at -224.032,-107.77 h7.62
  text ".PCB_Revision" at -339.369,-108.292 h7.62
  text "SHEET 2 OF 2" at -336.536,-114.77 h1.78
  text "SCALE:4:1" at -225.672,-114.77 h1.78
  text "1" at -304.12,-126.818 h7.62
  text "5" at 136.901,-126.97 h7.62
  text "6" at 247.34,-126.97 h7.62
  text "4" at 27.452,-127.249 h7.62
  text "2" at -193.807,-127.275 h7.62
  text "3" at -83.368,-127.275 h7.62
  text "7" at 357.449,-127.834 h7.62
TITLEBLOCK:
  lines w0.25: -38.98,-55.27 82.02,-55.27 ; 19.52,-36.27 82.02,-36.27 82.02,-64.77 -38.98,-64.77 -38.98,-42.77 82.02,-42.77 ; 37.52,-64.77 37.52,-36.27 ; 37.52,-47.77 82.02,-47.77 ; 71.02,-55.27 71.02,-47.77
  text "PRODUCT" at 23.764,-38.77 h1.52
  text "1511 SIXTH AVENUE, THIRD FLOOR" at 38.52,-38.77 h1.52
  text "DEVELOPMENT" at 21.832,-41.77 h1.52
  text "SEATTLE,WA 98101  206.381.0898" at 38.52,-41.77 h1.52
  text "DATE" at 38.52,-44.77 h1.02
  text "07/21/2016" at 51.4,-46.27 h2.03
  text "PRINTED CIRCUIT BOARD" at -20.216,-47.27 h2.29
  text "PART NUMBER" at 38.52,-49.77 h1.02
  text "REV" at 75.296,-49.77 h1.02
  text ".Board_Name" at -25.95,-53.4 h3.81
  text "601-" at 44.175,-53.471 h2.54
  text ".Board_Number" at 54.475,-53.471 h2.54
  text ".PCB_Revision" at 74.32,-53.938 h2.54
  text "PROPRIETARY AND CONFIDENTIAL" at 42.746,-58.27 h1.52
  text "THE INFORMATION CONTAINED IN THIS DRAWING IS PROPRIETARY AND" at 41.53,-60.27 h0.76
  text "RESTRICTED. ANY REPRODUCTION IN PART OR WHOLE WITHOUT THE" at 42.442,-61.77 h0.76
  text "EXPRESS WRITTEN PERMISSION OF THE OWNER IS PROHIBITED" at 43.158,-63.27 h0.76
DXF_TOP:
  circle w0.013: c43.7,0 r1.075
  circle w0.013: c4,0 r0.6
  circle w0.013: c39.7,0 r0.6
  circle w0.013: c0,0 r1.075
  circle w0.013: c0.648,253.593 r1.075
  circle w0.013: c40.348,253.593 r0.6
  circle w0.013: c4.648,253.593 r0.6
  circle w0.013: c44.348,253.593 r1.075
  circle w0.013: c156.564,251.656 r0.6
  circle w0.013: c160.564,251.656 r1.075
  circle w0.013: c120.864,251.656 r0.6
  circle w0.013: c116.864,251.656 r1.075
  circle w0.013: c242.176,250.596 r1.075
  circle w0.013: c281.876,250.596 r0.6
  circle w0.013: c246.176,250.596 r0.6
  circle w0.013: c285.876,250.596 r1.075
  lines w0.013: 113.714,250.856 ccw(c116.864,251.656) 120.037,250.956 122.364,250.956 122.364,252.356 120.037,252.356 ccw(c116.864,251.656) 113.714,252.456 ; 113.714,250.856 113.714,246.656 163.714,246.656 163.714,250.856 ; 113.714,250.856 113.714,252.456 ; 113.714,252.456 113.714,256.656 163.714,256.656 163.714,252.456 ; 163.714,250.856 cw(c160.564,251.656) 157.39,250.956 155.064,250.956 155.064,252.356 157.39,252.356 cw(c160.564,251.656) 163.714,252.456 ; 163.714,250.856 163.714,252.456 ; -3.15,-5 46.85,-5 46.85,5 -3.15,5 -3.15,-5 ; -2.502,248.593 47.498,248.593 47.498,258.593 -2.502,258.593 -2.502,248.593 ; 11.055,-4.25 32.645,-4.25 32.645,-0.82 11.055,-0.82 11.055,-4.25 ; 11.935,-3.37 31.765,-3.37 31.765,-1.7 11.935,-1.7 11.935,-3.37 ; 239.026,245.596 239.026,255.596 289.026,255.596 289.026,245.596 239.026,245.596 ; 253.231,246.346 253.231,249.776 274.821,249.776 274.821,246.346 253.231,246.346 ; 254.111,247.226 254.111,248.896 273.941,248.896 273.941,247.226 254.111,247.226
  text "KEEP WITHIN/KEEP OUT" at 116.84,290.437 h3.17
  text "BOARD OUTLINE" at 3.673,289.177 h3.17
  text "COMPONENT PLACEMENT" at 232.666,288.556 h3.17
  text "PRIMARY" at -44.14,258.09 h3.17
DXF_BOT:
  circle w0.013: c33.85,0 r1.25
  circle w0.013: c27.85,0 r1.25
  circle w0.013: c21.85,0 r1.25
  circle w0.013: c15.85,0 r1.25
  circle w0.013: c9.85,0 r1.25
  circle w0.013: c43.7,0 r1.075
  circle w0.013: c0,0 r1.075
  circle w0.013: c0,0 r2.1
  circle w0.013: c43.7,0 r2.1
  circle w0.013: c4,0 r0.6
  circle w0.013: c39.7,0 r0.6
  circle w0.013: c31.263,27.768 r1.075
  circle w0.013: c31.263,27.768 r2.1
  circle w0.013: c-8.437,27.768 r0.6
  circle w0.013: c-12.437,27.768 r2.1
  circle w0.013: c27.263,27.768 r0.6
  circle w0.013: c-12.437,27.768 r1.075
  circle w0.013: c-2.587,27.768 r1.25
  circle w0.013: c3.413,27.768 r1.25
  circle w0.013: c9.413,27.768 r1.25
  circle w0.013: c15.413,27.768 r1.25
  circle w0.013: c21.413,27.768 r1.25
  circle w0.013: c27.739,46.143 r0.6
  circle w0.013: c-7.961,46.143 r0.6
  circle w0.013: c31.739,46.143 r2.1
  circle w0.013: c-11.961,46.143 r2.1
  circle w0.013: c-11.961,46.143 r1.075
  circle w0.013: c31.739,46.143 r1.075
  circle w0.013: c-2.111,46.143 r1.25
  circle w0.013: c3.889,46.143 r1.25
  circle w0.013: c9.889,46.143 r1.25
  circle w0.013: c15.889,46.143 r1.25
  circle w0.013: c21.889,46.143 r1.25
  circle w0.013: c32.64,63.493 r1.075
  circle w0.013: c32.64,63.493 r2.1
  circle w0.013: c-11.06,63.493 r1.075
  circle w0.013: c-11.06,63.493 r2.1
  circle w0.013: c28.64,63.493 r0.6
  circle w0.013: c-7.06,63.493 r0.6
  circle w0.013: c-1.21,63.493 r1.25
  circle w0.013: c4.79,63.493 r1.25
  circle w0.013: c10.79,63.493 r1.25
  circle w0.013: c16.79,63.493 r1.25
  circle w0.013: c22.79,63.493 r1.25
  lines w0.013: -15.587,22.768 -15.587,32.768 34.413,32.768 34.413,22.768 -15.587,22.768 ; -15.111,41.143 34.889,41.143 34.889,51.143 -15.111,51.143 -15.111,41.143 ; -14.21,58.493 -14.21,68.493 35.79,68.493 35.79,58.493 -14.21,58.493 ; -3.15,-5 -3.15,5 46.85,5 46.85,-5 -3.15,-5
  text "SECONDARY" at -59.171,30.494 h3.17
Drill Drawing:
  lines w0.254: 109.64,-7.45 110.063,-7.45 110.487,-7.873 110.91,-7.45 111.333,-7.45 110.91,-7.027 111.333,-6.603 110.91,-6.603 110.487,-6.18 110.063,-6.603 109.64,-6.603 110.063,-7.027 109.64,-7.45 ; 109.64,-2.37 111.333,-2.37 110.487,-4.063 109.64,-2.37 ; 109.64,-0.253 111.333,-0.253 111.333,1.44 109.64,1.44 109.64,-0.253
  lines w0.381: 108.121,-9.016 314.669,-9.016 ; 108.121,2.414 314.669,2.414 ; 122.114,-12.826 122.114,6.224 ; 135.826,-12.826 135.826,6.224 ; 163.504,-12.826 163.504,6.224 ; 176.353,-12.826 176.353,6.224 ; 194.992,-12.826 194.992,6.224 ; 233.08,-12.826 233.08,6.224 ; 248.063,-12.826 248.063,6.224 ; 267.006,-12.826 267.006,6.224 ; 286.051,-12.826 286.051,6.224 ; 108.121,-12.826 314.669,-12.826 314.669,6.224 108.121,6.224 108.121,-12.826
  text "Symbol" at 110.407,3.557 h1.83
  text "Count" at 123.257,3.557 h1.83
  text "Hole Size" at 136.969,3.557 h1.83
  text "Plated" at 164.647,3.557 h1.83
  text "Hole Type" at 177.496,3.557 h1.83
  text "Drill Layer Pair" at 196.135,3.557 h1.83
  text "Via/Pad" at 234.223,3.557 h1.83
  text "Pad Shape" at 249.206,3.557 h1.83
  text "Template" at 268.149,3.557 h1.83
  text "Hole Tolerance" at 287.194,3.557 h1.83
  text "30" at 123.257,-0.253 h1.52
  text "0.250mm (9.84mil)" at 136.969,-0.253 h1.52
  text "PTH" at 164.647,-0.253 h1.52
  text "Round" at 177.496,-0.253 h1.52
  text "Top Layer - Bottom Layer" at 196.135,-0.253 h1.52
  text "Via" at 234.223,-0.253 h1.52
  text "Rounded" at 249.206,-0.253 h1.52
  text "v50h25m0mx0" at 268.149,-0.253 h1.52
  text "2" at 123.257,-4.063 h1.52
  text "1.200mm (47.24mil)" at 136.969,-4.063 h1.52
  text "NPTH" at 164.647,-4.063 h1.52
  text "Round" at 177.496,-4.063 h1.52
  text "Top Layer - Bottom Layer" at 196.135,-4.063 h1.52
  text "Pad" at 234.223,-4.063 h1.52
  text "Rounded" at 249.206,-4.063 h1.52
  text "c120hn120" at 268.149,-4.063 h1.52
  text "2" at 123.257,-7.873 h1.52
  text "2.150mm (84.65mil)" at 136.969,-7.873 h1.52
  text "NPTH" at 164.647,-7.873 h1.52
  text "Round" at 177.496,-7.873 h1.52
  text "Top Layer - Bottom Layer" at 196.135,-7.873 h1.52
  text "Pad" at 234.223,-7.873 h1.52
  text "Rounded" at 249.206,-7.873 h1.52
  text "c200hn215" at 268.149,-7.873 h1.52
  text "34 Total" at 123.257,-11.683 h1.52
  text ".Layer_Name" at 3.975,-17.1 h3.81
DXF_TOP (Mech19):
  lines w0.013: 39.426,-3.767 40.036,-3.767 40.036,-1.767 39.426,-1.767 39.426,-3.767 ; 39.587,-1.963 cw(c39.685,-1.965) 39.689,-1.867 39.742,-1.88 39.773,-1.91 39.754,-1.922 39.721,-1.896 39.688,-1.89 ccw(c39.683,-1.963) 39.609,-1.961 ccw(c39.684,-1.959) 39.688,-2.034 39.729,-2.024 39.754,-2.002 39.773,-2.014 cw(c39.692,-1.959) 39.687,-2.056 cw(c39.682,-1.962) 39.587,-1.963 ; 40.426,-3.767 41.036,-3.767 41.036,-1.767 40.426,-1.767 40.426,-3.767 ; 40.561,-1.871 40.585,-1.871 40.64,-2.002 40.699,-1.871 40.703,-1.871 40.762,-2.002 40.817,-1.871 40.84,-1.871 40.764,-2.053 40.759,-2.053 40.701,-1.922 40.641,-2.053 40.637,-2.053 40.561,-1.871 ; 41.426,-3.767 42.036,-3.767 42.036,-1.767 41.426,-1.767 41.426,-3.767 ; 41.619,-1.871 41.643,-1.871 41.704,-2.004 41.765,-1.871 41.789,-1.871 41.705,-2.053 41.702,-2.053 41.619,-1.871 ; 42.426,-3.767 42.426,-1.767 43.036,-1.767 43.036,-3.767 42.426,-3.767 ; 42.593,-1.958 42.605,-2.021 42.635,-2.049 42.675,-2.057 ccw(c42.678,-1.976) 42.757,-1.96 42.757,-1.871 42.734,-1.871 42.734,-1.955 42.734,-1.975 42.731,-2 cw(c42.68,-1.979) 42.675,-2.034 cw(c42.671,-1.98) 42.619,-1.998 42.616,-1.979 42.616,-1.955 42.616,-1.871 42.593,-1.871 42.593,-1.958

## Dimensions
189.328,33.528 to 192,43 on FAB_DWG

## Text inside footprints (layer, text, board x,y; h text height)
D1: Mechanical 32 "C" at 14.96,3.013 h0.64; Mechanical 32 "A" at 16.965,3.005 h0.64
D2: Mechanical 32 "C" at 32.96,2.912 h0.64; Mechanical 32 "A" at 34.965,2.904 h0.64
D3: Mechanical 32 "C" at 20.956,2.913 h0.64; Mechanical 32 "A" at 22.961,2.905 h0.64
D4: Mechanical 32 "C" at 26.934,3.063 h0.64; Mechanical 32 "A" at 28.939,3.055 h0.64
J1: Top Overlay "1" at 32.9,0.731 h0.76